# Altium PCB Protocol-Analyzer.PcbDoc
Units mm, origin at the board's own origin, x right, y up, seen from the top; angles counter-clockwise.
Board outline 20 x 30 mm, 2 copper layers (Top Layer, Bottom Layer), stack 1.534 mm thick; 5 components, 27 nets, 62 pads, 7 vias.
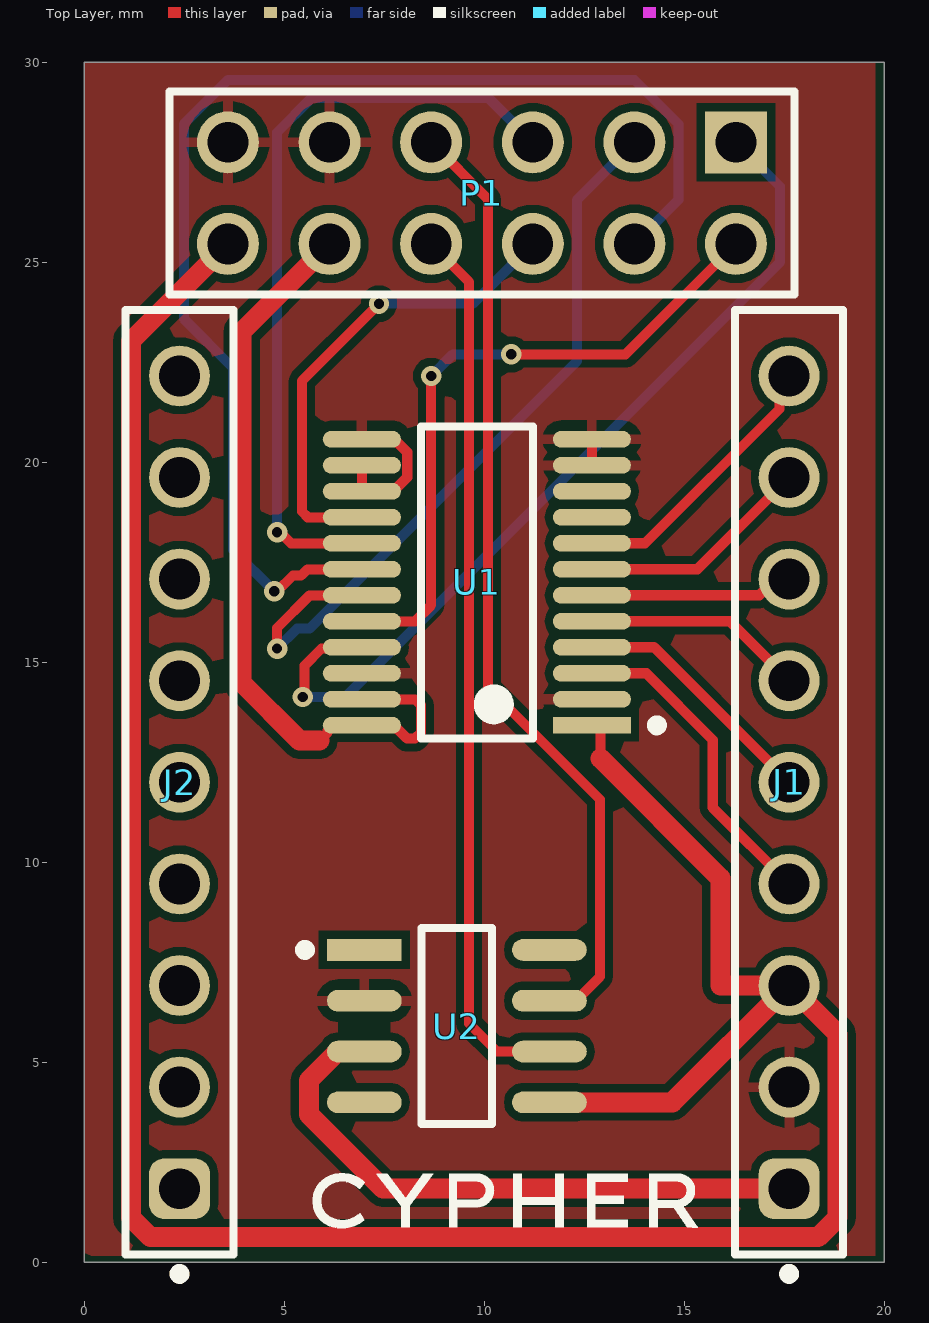
[diagram p0: Top Layer view]
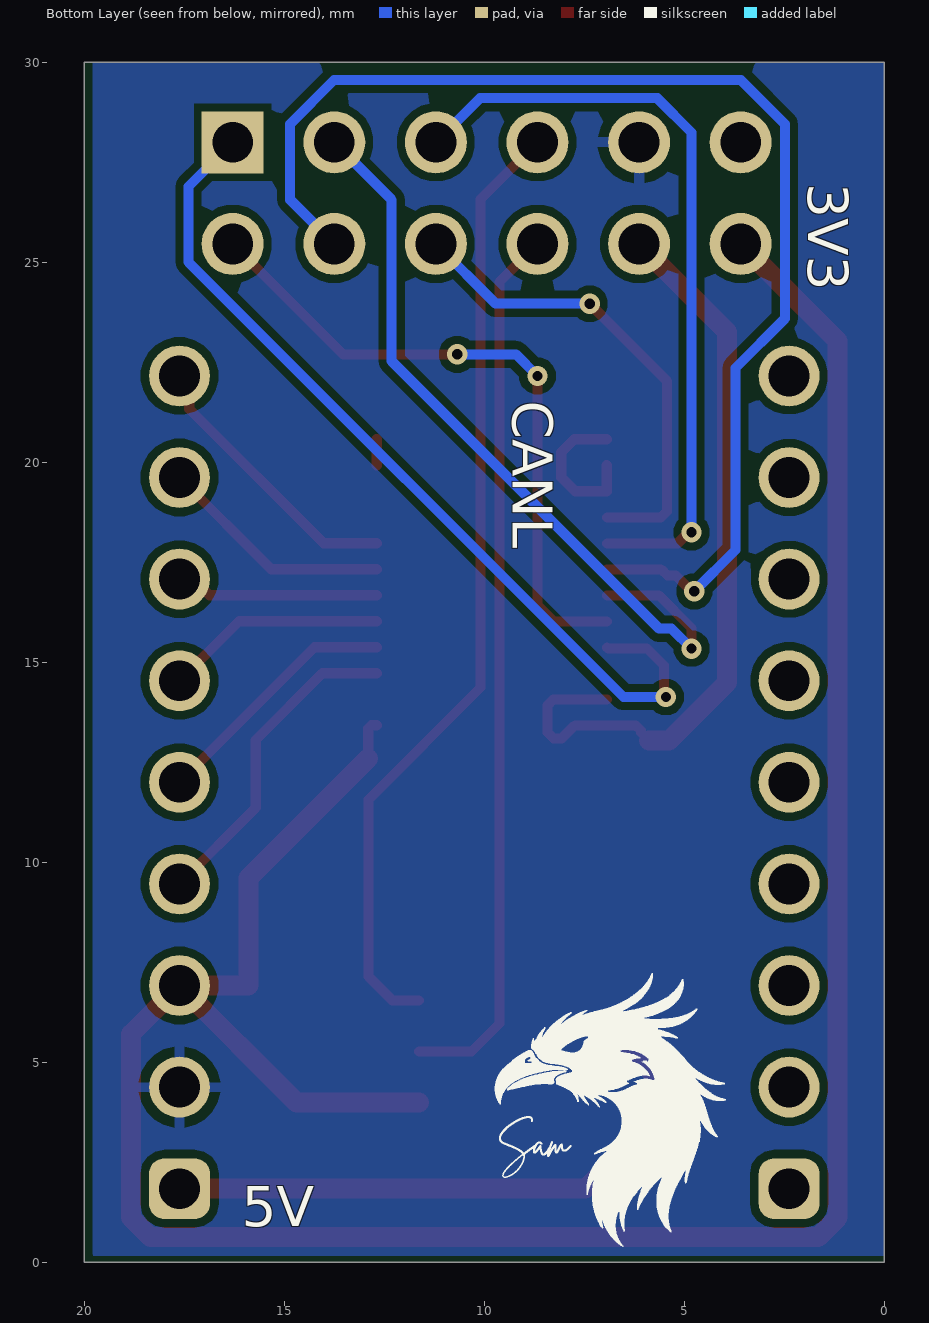
[diagram p1: Bottom Layer view, seen from below]
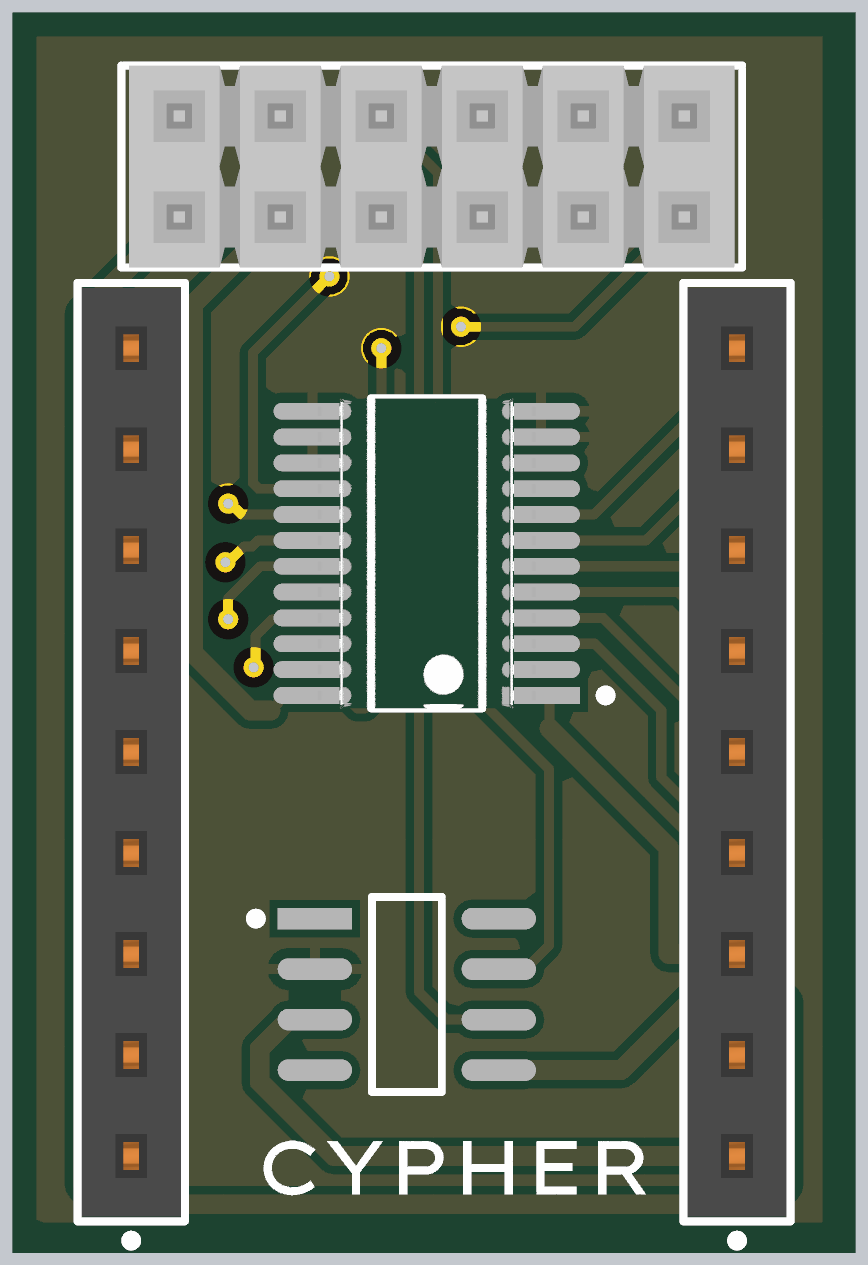
[diagram p2: 3D render of the assembled board from above, using the file's embedded part models]

## Layer stack, top to bottom
Top Solder: solder mask 0.0127, Solder Resist, Dk 3.3
Top Layer: signal copper 0.0178
Dielectric1: core 1.4986, FR-4, Dk 4.3
Bottom Layer: signal copper 0.0178
Bottom Solder: solder mask 0.0127, Solder Resist, Dk 3.3

## Board outline
0,0 20,0 20,30 0,30

## Design rules (kind name [scope] priority, off if disabled: settings)
Clearance [All] p1: gap=0.203 ignorepadtopadclearanceinfootprint=FALSE
DiffPairsRouting [All] p1: maxlimit=0.254 minlimit=0.254 mostfreqgap=0.254 toplayer_minwidth=0.254 toplayer_maxwidth=0.254 toplayer_prefwidth=0.254 bottomlayer_minwidth=0.254 bottomlayer_maxwidth=0.254 bottomlayer_prefwidth=0.254 maxuncoupledlength=12.7
HoleSize [All] p1: absolutevalues=TRUE maxlimit=7.62 minlimit=0.254 maxpercent=80.000 minpercent=20.000
MinimumAnnularRing [All] p1: minimumring=0.125
MinimumSolderMaskSliver [All] p1: minsoldermaskwidth=0.1
PasteMaskExpansion [All] p1: expansion=0.254
PlaneClearance [All] p1: clearance=0.381
PlaneConnect [All] p1: pad.planeconnectstyle=Relief pad.reliefexpansion=0.508 pad.reliefentries=4 pad.reliefconductorwidth=0.254 pad.reliefairgap=0.254 via.planeconnectstyle=Direct via.reliefexpansion=0.508 via.reliefentries=4 via.reliefconductorwidth=0.254 via.reliefairgap=0.254
PolygonConnect [All] p1: thpad.connectstyle=Relief thpad.reliefconductorwidth=0.254 thpad.reliefentries=4 thpad.polygonreliefangle="90 Angle" thpad.airgapwidth=0.254 smdpad.connectstyle=Relief smdpad.reliefconductorwidth=0.254 smdpad.reliefentries=4 smdpad.polygonreliefangle="90 Angle" smdpad.airgapwidth=0.254 via.connectstyle=Direct via.reliefconductorwidth=0.254 via.reliefentries=4 via.polygonreliefangle="90 Angle" via.airgapwidth=0.254
RoutingVias [All] p1: holewidth=0.254 width=0.508 viastyle="Through Hole" minholewidth=0.254 minwidth=0.508 maxholewidth=0.254 maxwidth=0.508
SMDNeckDown [All] p1: percent=100.000
SilkToSolderMaskClearance SilkscreenOverComponentPads [IsPad] p1: minsilkscreentomaskgap=0.254 clearancetoexposedcopper=TRUE
SolderMaskExpansion [All] p1: expansion=0.254 istentingtop=FALSE
SupplyNets "Schematic Supply Nets" [InNet('GND')] p1: voltage=0.000
Width Width_Signal [InNetClass('Signals')] p1: maxlimit=0.254 minlimit=0.25 preferedwidth=0.25
Width Width_Power [InNetClass('Power')] p2: maxlimit=0.75 minlimit=0.25 preferedwidth=0.5
Width [All] p3: maxlimit=0.254 minlimit=0.254 preferedwidth=0.254
23 further rules are at their usual default settings.

## Classes and differential pairs
net class Power: 3V3 5V V_REF
net class Signals: CAN_H CAN_L GP0 GP1 GP2 GP3 GP4 GP5 GP14 GP15 GP18 GP19 GP20 GP21 GP22 NetP1_1 NetP1_2 NetP1_3 NetP1_4 NetP1_5 NetP1_6 RX TX

## Components (designator, comment, footprint, x,y, rotation, side; value= is the part's Value field where it differs from the comment)
J1 "61300911821" 61300911821 17.62,12 r90 top locked
J2 "61300911821" 61300911821 2.38,12 r90 top locked
P1 "TSW-106-07-G-D" SMTC-TSW-106-07-X-D 16.291,28 r180 top
U1 "SN74LVC8T245MPWREP" FP-PW0024A-IPC_A 9.814,17 r180 top
U2 "TCAN1051HVDRQ1" FP-D0008B-IPC_C 9.314,5.905 r0 top

## Footprints (in the part's own frame and the unit in brackets; to place one, negate y for a bottom-side part, rotate by r counter-clockwise, add the part's x,y. Pads: shape width x height; smd on the part's side, far side on the other; paste and mask are expansions set on the pad)
61300911821 [mm] "Socket Header, Pitch 2.54 mm, THT, Vertical, single row, 9p"
  rrect50% 1.52x1.52 hole 1.02: 1(-10.16,0)
  round 1.52 hole 1.02: 2(-7.62,0) 3(-5.08,0) 4(-2.54,0) 5(0,0) 6(2.54,0) 7(5.08,0) 8(7.62,0) 9(10.16,0)
  silkscreen extent -12.41,-1.35 11.81,1.35, body extent -11.68,-1.25 11.68,1.25, height 8.55
FP-D0008B-IPC_C [mm]
  rect 1.869x0.542 smd paste+0 mask+0: 1(-2.314,1.905)
  rrect100% 1.869x0.542 smd paste+0 mask+0: 2(-2.314,0.635) 3(-2.314,-0.635) 4(-2.314,-1.905) 5(2.314,-1.905) 6(2.314,-0.635) 7(2.314,0.635) 8(2.314,1.905)
  silkscreen extent -3.92,-2.45 0.88,2.45
FP-PW0024A-IPC_A [mm]
  rect 1.955x0.421 smd paste+0 mask+0: 1(-2.875,3.575)
  rrect100% 1.955x0.421 smd paste+0 mask+0: 2(-2.875,2.925) 3(-2.875,2.275) 4(-2.875,1.625) 5(-2.875,0.975) 6(-2.875,0.325) 7(-2.875,-0.325) 8(-2.875,-0.975) 9(-2.875,-1.625) 10(-2.875,-2.275) 11(-2.875,-2.925) 12(-2.875,-3.575) 13(2.875,-3.575) 14(2.875,-2.925) 15(2.875,-2.275) 16(2.875,-1.625) 17(2.875,-0.975) 18(2.875,-0.325) 19(2.875,0.325) 20(2.875,0.975) 21(2.875,1.625) 22(2.875,2.275) 23(2.875,2.925) 24(2.875,3.575)
  silkscreen extent -4.63,-3.9 1.4,3.9, body extent -4.35,-4.4 4.35,4.4, height 0.25
SMTC-TSW-106-07-X-D [mm] ".025 SQ Post Terminal Strip Assembly, 2x6 Pins, Vertical, 2.54mm Pitch, Male"
  rect 1.55x1.55 hole 1.02: 1(0,0)
  round 1.55 hole 1.02: 2(0,2.54) 3(2.54,0) 4(2.54,2.54) 5(5.08,0) 6(5.08,2.54) 7(7.62,0) 8(7.62,2.54) 9(10.16,0) 10(10.16,2.54) 11(12.7,0) 12(12.7,2.54)
  silkscreen extent -1.46,-1.27 14.16,3.81, body extent -1.27,-1.27 13.97,3.81, height 8.38

## Part data
J1 J2: library part CMP-1502-01331-4, "THT Vertical Socket Header WR-PHD, Pitch 2.54 mm, Single Row, 9 pins", Contact Resistance=20mΩ, Current Rating=3A, Operating Supply Voltage=250V, Gender=Female, Lead Pitch=2.54mm, Number of Pins=9, Orientation=Vertical
P1: library part CMP-1024-00379-1, "0.025\" SQ Post Header, Through-hole, Vertical, -55 to 125 degC, 2.54 mm Pitch, 12-Pin, Male, RoHS", Manufacturer=Samtec, Temperature Range="-55 to 125 degC", ComponentLink1Description="Manufacturer URL", ComponentLink1URL=http://www.samtec.com, ComponentLink2Description=Datasheet, ComponentLink2URL=http://www.samtec.com/documents/webfiles/pdf/TSW_TH.PDF, ComponentLink3Description="Package Specification", ComponentLink3URL=http://www.samtec.com/documents/webfiles/cpdf/TSW-XXX-XX-XXX-X-XX-XXX-MKT.pdf, DatasheetVersion=F-214, Mounting Technology=Through-hole, Orientation=Vertical, PackageDescription=".025[0.64] SQ. Post Terminal Strip Assembly", PackageReference=TSW-106-07-X-D, PackageVersion="DM, 8/1988", PartNumber=TSW-106-07-G-D, Pitch="2.54 mm", RoHS=True
U1: library part CMP-04899-000093-1, "IC TRNSLTR BIDIRECTIONAL 24TSSOP", Case/Package=TSSOP, High Level Output Current=-32mA, Low Level Output Current=32mA, Max Operating Temperature=125°C, Max Supply Voltage=5.5V, Min Operating Temperature=-55°C, Min Supply Voltage=1.65V, Package Quantity=1, Quiescent Current=15uA, Data Rate=500Mbps, Direction=Bidirectional, Lead Free="Lead Free", Logic Function=Translator, Mount="Surface Mount", Number of Bits=8, Number of Channels=8, Number of Elements=1, Number of Inputs=8, Number of Outputs=8, Number of Pins=24, Output Current=32mA, Output Type=3-STATE, Packaging="Tape and Reel", Polarity=Non-Inverting, Propagation Delay=8.2ns, Radiation Hardening=No, REACH SVHC="No SVHC", RoHS Compliant=Yes, Series=74LVC, Technology=CMOS, Turn-On Delay Time=40ns, Weight=0.003157oz
U2: library part CMP-04872-000101-1, "IC TRANSCEIVER HALF 1/1 8SOIC", Case/Package=SOIC, Max Operating Temperature=125°C, Max Supply Voltage=5.5V, Min Operating Temperature=-55°C, Min Supply Voltage=4.5V, Interface=CAN, Lead Free="Lead Free", Number of Pins=8, Packaging="Cut Tape", REACH SVHC="No SVHC", RoHS Compliant=Yes

## Via types
v1: diameter 0.508, hole 0.254, Top Layer to Bottom Layer, 7 vias

## Nets (pads, with @x,y where several pads share a name; then routed paths per layer and width w, separated by ;. In a path a pad name is that pad's centre, name@x,y a point inside that pad or via, vN(x,y) a via of type N, cw(c..) or ccw(c..) an arc to the next point about the centre after c; other vN are vias at no path point)
3V3: J1.3 P1.12 U1.1 U2.5 | length 66.6
  Top Layer w0.254: U1.1 12.82,13.425 12.903,13.342 12.903,12.6
  Top Layer w0.5: P1.12 1.167,23.036 1.167,1.115 1.655,0.627 18.345,0.627 18.833,1.115 18.833,5.707 J1.3 ; U2.5 14.7,4 J1.3 ; 12.903,12.6 15.899,9.604 15.899,6.92 J1.3
5V: J1.1 U2.3 | length 15.3
  Top Layer w0.5: U2.3 6.986,5.256 6.323,5.256 5.612,4.546 5.612,3.7 7.472,1.84 J1.1
CAN_H: P1.7 U2.7 | length 24.1
  Top Layer w0.25: P1.7 10.093,26.578 10.093,14.369 12.89,11.572 12.89,7.139 12.291,6.54 U2.7
CAN_L: P1.8 U2.6 | length 22.2
  Top Layer w0.25: P1.8 9.619,24.512 9.619,5.969 10.318,5.27 U2.6
GND: J1.2 P1.9 P1.11 U1.2 U1.11 U1.12 U1.13 U1.14 U1.15 U1.22 U2.2 | length 4.5
  Top Layer w0.254: U1.14 U1.15 7.725,19.275 8.075,19.625 8.075,20.251 7.751,20.575 U1.13 ; U1.11 U1.12
GP0: J1.4 U1.3 | length 8.1
  Top Layer w0.254: U1.3 14.048,14.725 15.713,13.06 15.713,11.367 J1.4
GP1: J1.5 U1.4 | length 6.3
  Top Layer w0.254: U1.4 14.245,15.375 J1.5
GP2: J1.6 U1.5 | length 5.5
  Top Layer w0.254: U1.5 16.135,16.025 J1.6
GP3: J1.7 U1.6 | length 5.1
  Top Layer w0.254: U1.6 16.872,16.675 17.277,17.08 J1.7
GP4: J1.8 U1.7 | length 5.9
  Top Layer w0.254: U1.7 15.325,17.325 J1.8
GP5: J1.9 U1.8 | length 7
  Top Layer w0.254: U1.8 14.018,17.975 17.378,21.335 17.378,21.918 J1.9
GP14: J2.3
GP15: J2.4
GP18: J2.5
GP19: J2.6
GP20: J2.7
GP21: J2.8
GP22: J2.9
NetP1_1: P1.1 U1.21 | length 22.3
  Top Layer w0.25: v1(5.461,14.132) 5.51,14.182 5.51,14.919 5.933,15.342 6.906,15.342 U1.21
  Bottom Layer w0.25: v1(5.461,14.132) 6.524,14.132 17.394,25.003 17.394,26.897 P1.1
NetP1_2: P1.2 U1.20 | length 16.6
  Top Layer w0.25: U1.20 8.269,16.025 8.671,16.427 v1(8.671,22.16) ; v1(10.675,22.7) 13.531,22.7 P1.2
  Bottom Layer w0.25: v1(8.671,22.16) 9.211,22.7 v1(10.675,22.7)
NetP1_3: P1.3 U1.19 | length 19.5
  Top Layer w0.25: v1(4.82,15.342) 4.82,15.859 5.636,16.675 U1.19
  Bottom Layer w0.25: v1(4.82,15.342) 5.319,15.842 5.628,15.842 12.314,22.528 12.314,26.563 P1.3
NetP1_4: P1.4 U1.18 | length 31.8
  Top Layer w0.25: v1(4.75,16.775) 4.82,16.775 5.214,17.169 5.422,17.169 5.578,17.325 U1.18
  Bottom Layer w0.25: v1(4.75,16.775) 3.719,17.806 3.719,22.36 2.488,23.591 2.488,28.457 3.588,29.556 13.755,29.556 14.854,28.457 14.854,26.563 P1.4
NetP1_5: P1.5 U1.17 | length 19.4
  Top Layer w0.25: v1(4.82,18.25) 4.89,18.25 5.165,17.975 U1.17
  Bottom Layer w0.25: v1(4.82,18.25) 4.82,28.249 5.674,29.103 10.108,29.103 P1.5
NetP1_6: P1.6 U1.16 | length 12
  Top Layer w0.25: U1.16 5.586,18.625 5.439,18.771 5.439,22.038 v1(7.366,23.965)
  Bottom Layer w0.25: v1(7.366,23.965) 9.716,23.965 P1.6
RX: J2.2
TX: J2.1
V_REF: P1.10 U1.23 U1.24 | length 19.6
  Top Layer w0.25: 5.884,13.043 6.086,13.244 6.086,13.293 6.217,13.425 7.737,13.425 8.062,13.1 8.269,13.1 8.416,13.246 8.416,13.929 8.269,14.075 U1.23
  Top Layer w0.5: 5.884,13.043 5.382,13.043 3.93,14.495 3.93,23.259 P1.10
pads on no net: U1.9 U1.10 U2.1 U2.4 U2.8

## Polygon pours and split planes (outlines as drawn)
GND on Bottom Layer "NONET_L02_P-001" (solid, pour order 0): 0,30 19.79,30 19.79,0.21 19.831,0.169 0,0.169 0,29.636
GND on Top Layer "NONET_L02_P-001" (solid, pour order 1): 19.79,30 19.773,29.983 19.773,0.169 0.169,0.169 0,0 0,30

## Silkscreen, mask and mechanical layers (free items; w line width, h text height)
Top Overlay:
  drawing of 6 lines, arcs and shapes, not listed
Bottom Overlay:
  drawing of 5 lines, arcs and shapes, not listed
  text "3V3" at 1.906,26.971 h1 r90
  text "CANL" at 9.284,21.533 h1 r90
  text "5V" at 16.07,0.896 h1
Board:
  the board outline again, w1.2